# EAGLE board TRV_ANAREN_V0.4 (EAGLE 6.3)
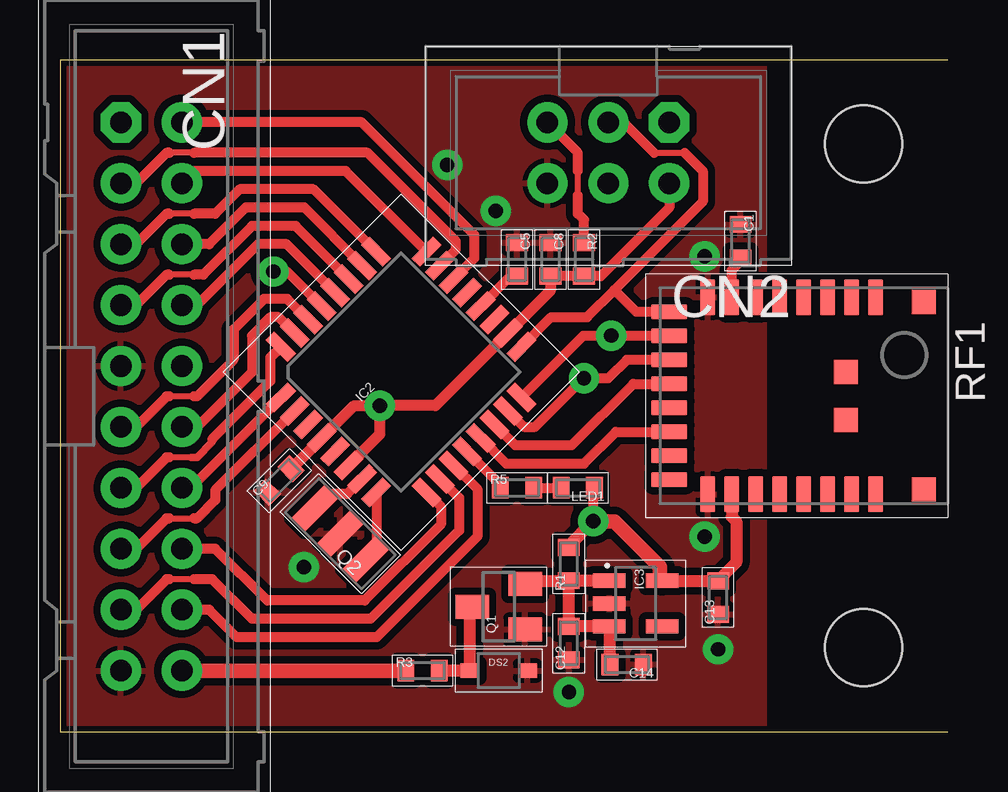
[diagram p0: board, top side]
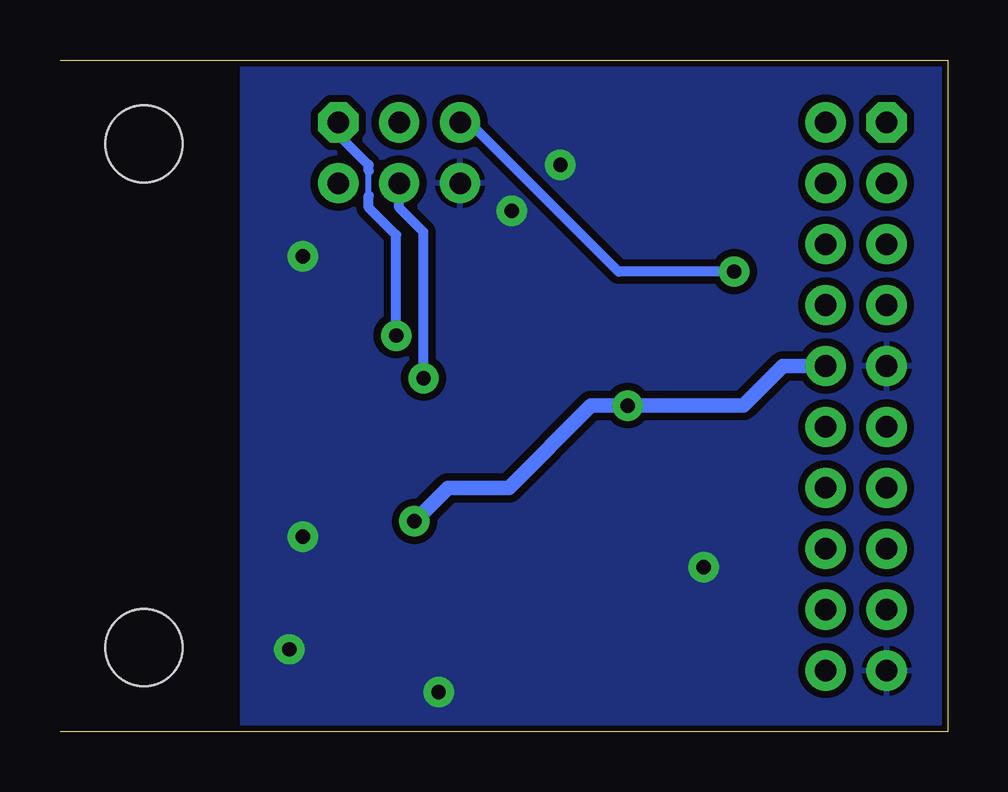
[diagram p1: board, bottom side, seen from below]

Size 37 x 28 mm. Coordinates in mm from the lower left corner, seen from the top.
Outline: 37,0 0,0 0,28 37,28
Copper layers (1*16): Top 0.035mm / dielectric 1.5mm / Bottom 0.035mm
Design rules "default *": minimum track width 8mil, minimum drill 0.3mm, track to track 12mil, track to pad 12mil, pad to pad 10mil, via to via 12mil, smd to smd 10mil, copper to edge 10mil, drill to drill 8mil, minimum pad ring 5mil, minimum via ring 8mil, stop-mask expansion 4mil, vias tented up to drill 25mil, thermal gap 8mil
Holes 3.2 mm at 33.5,24.5 33.5,3.5

## Footprints (pad centres in the part's own frame; a part is rotated, then mirrored left to right if it is on the bottom)
0603 = smd 0.7 x 0.9: 1 -0.697,0; 2 0.697,0
ML20 = drill 0.9 pad 1.676 octagon: 1 -11.43,-1.27 | drill 0.9 pad 1.676: 2 -11.43,1.27; 3 -8.89,-1.27; 4 -8.89,1.27; 5 -6.35,-1.27; 6 -6.35,1.27; 7 -3.81,-1.27; 8 -3.81,1.27; 9 -1.27,-1.27; 10 -1.27,1.27; 11 1.27,-1.27; 12 1.27,1.27; 13 3.81,-1.27; 14 3.81,1.27; 15 6.35,-1.27; 16 6.35,1.27; 17 8.89,-1.27; 18 8.89,1.27; 19 11.43,-1.27; 20 11.43,1.27
ML6 = drill 0.9 pad 1.676 octagon: 1 -2.54,-1.27 | drill 0.9 pad 1.676: 2 -2.54,1.27; 3 0,-1.27; 4 0,1.27; 5 2.54,-1.27; 6 2.54,1.27
SOD323 = smd 0.8 x 0.6: A 1.2,0; C -1.2,0
TQFP32-08 = smd 1.27 x 0.5: 1 -4.293,2.8; 2 -4.293,2; 3 -4.293,1.2; 4 -4.293,0.4; 5 -4.293,-0.4; 6 -4.293,-1.2; 7 -4.293,-2; 8 -4.293,-2.8; 17 4.293,-2.8; 18 4.293,-2; 19 4.293,-1.2; 20 4.293,-0.4; 21 4.293,0.4; 22 4.293,1.2; 23 4.293,2; 24 4.293,2.8 | smd 0.5 x 1.27: 9 -2.8,-4.293; 10 -2,-4.293; 11 -1.2,-4.293; 12 -0.4,-4.293; 13 0.4,-4.293; 14 1.2,-4.293; 15 2,-4.293; 16 2.8,-4.293; 25 2.8,4.293; 26 2,4.293; 27 1.2,4.293; 28 0.4,4.293; 29 -0.4,4.293; 30 -1.2,4.293; 31 -2,4.293; 32 -2.8,4.293
SOT23-5 = smd 0.6 x 1.35: 1 -0.95,-1.101; 2 0,-1.101; 3 0.95,-1.101; 4 0.95,1.101; 5 -0.951,1.101
SOT23 = smd 1 x 1.4: 1 -0.95,-1.1; 2 0.95,-1.1; 3 0,1.1
CR = smd 0.8 x 2: 1 -1.5,0; 2 1.5,0; M 0,0
ANAREN_C = smd 1.5 x 0.61: 1 -4.11,2.6; 2 -4.11,1.6; 3 -4.11,0.6; 4 -4.11,-0.4; 5 -4.11,-1.4; 6 -4.11,-2.4; 7 -4.11,-3.4; 8 -4.11,-4.4; 17 4.11,-4.4; 18 4.11,-3.4; 19 4.11,-2.4; 20 4.11,-1.4; 21 4.11,-0.4; 22 4.11,0.6; 23 4.11,1.6; 24 4.11,2.6 | smd 0.61 x 1.5: 9 -3.5,-6; 10 -2.5,-6; 11 -1.5,-6; 12 -0.5,-6; 13 0.5,-6; 14 1.5,-6; 15 2.5,-6; 16 3.5,-6 | smd 1 x 1: PL2 -3.91,4.6; PL3 3.91,4.6; PL4 -1,1.35; PL5 1,1.35

## Placement (x,y rotation side)
C1  n.b.  [0603]  28.37,20.45 270 top
C5  100n  [0603]  19.05,19.68 270 top
C8  100n  [0603]  20.45,19.68 270 top
C9  100n  [0603]  9.14,10.46 45 top
C12  1u  [0603]  21.21,3.68 90 top
C13  1u  [0603]  27.43,5.59 90 top
C14  100n  [0603]  23.63,2.79 180 top
CN1  EXT  [ML20]  3.81,13.97 270 top
CN2  ISP  [ML6]  22.86,24.13 180 top
DS2  PESD12VL1BA  [SOD323]  18.29,2.54 0 top
IC2  MEGA168PA-AU  [TQFP32-08]  14.22,14.99 45 top
IC3  LP2992-IM5-3.3  [SOT23-5]  24,5.33 270 top
LED1  LEDR  [0603]  21.59,10.16 180 top
Q1  IRLM9301  [SOT23]  18.29,5.21 90 top
Q2  [CR]  11.68,8.26 135 top
R1  n.b.  [0603]  21.21,6.99 90 top
R2  10k  [0603]  21.84,19.68 270 top
R3  0R  [0603]  15.11,2.54 0 top
R5  330R  [0603]  19.05,10.16 0 top
RF1  [ANAREN_C]  31.4,14 270 top

## Library data of the parts
C1 C5 C8 C9 C12-C14 R1-R3 R5 = RCL
CN1 CN2 = Conn
DS2 = Diode
IC2 = atmel
IC3 = DCDC
LED1 = Optic
Q1 = Transistor
Q2 = QUARTZ
RF1 = RF

## Nets
+3V3: C8.2 C9.2 C13.2 CN1.10 CN2.2 IC2.4 IC2.6 IC2.18 IC3.5 LED1.1 R1.2 R2.2 RF1.18
GND: C1.1 C5.1 C8.1 C9.1 C12.1 C13.1 C14.1 CN1.9 CN1.19 CN2.6 DS2.A IC2.3 IC2.5 IC2.21 IC3.2 Q1.1 Q2.M RF1.8 RF1.17
MISO: CN2.1 IC2.16 RF1.10
MOSI: CN2.4 IC2.15 RF1.11
N$1: C1.2 RF1.7
N$2: IC2.12 R5.1
N$3: CN1.2 IC2.22
N$5: DS2.C Q1.3 R3.2
N$6: C5.2 IC2.20
N$12: C12.2 C14.2 IC3.1 IC3.3 Q1.2 R1.1
N$18: IC2.7 Q2.2
N$19: IC2.8 Q2.1
N$21: LED1.2 R5.2
PC0: CN1.3 IC2.23
PC1: CN1.4 IC2.24
PC2: CN1.5 IC2.25
PC3: CN1.6 IC2.26
PC4: CN1.7 IC2.27
PC5: CN1.8 IC2.28
PD2: CN1.13 IC2.32
PD3: CN1.14 IC2.1
PD4: CN1.15 IC2.2
PD5: CN1.16 IC2.9
PD6: CN1.17 IC2.10
PD7: CN1.18 IC2.11
RIRQ: IC2.13 RF1.14
RSEL: IC2.14 RF1.12
RST: CN2.5 IC2.29 R2.1
RXD: CN1.11 IC2.30
SCK: CN2.3 IC2.17 RF1.9
TXD: CN1.12 IC2.31
VIN: CN1.20 R3.1

## Tracks (layer width: path | path; a pad name or v marks a point on that pad's centre or on a via)
+3V3  (via drill 0.6 pad 1.27)
  Top 0.406: IC2.4 | CN2.2 25.4,21.84 22.54,18.99 R2.2 C8.2 | LED1.1 22.23,10.1 v22.23,8.76
  Top 0.457: C9.2 IC2.4 | IC2.4 12.26,13.59 v13.34,13.59 | IC2.6 13.34,12.4 v13.34,13.59 | v13.34,13.59 15.65,13.59 IC2.18 20.45,18.38 C8.2
  Top 0.508: IC3.5 C13.2 28.19,7.05 28.19,8.76 28,8.96 RF1.18 | R1.2 21.21,7.75 v22.23,8.76
  Top 0.61: IC3.5 25.02,6.37 25.02,6.86 23.11,8.76 v22.23,8.76
  Bottom 0.61: CN1.10 6.86,15.24 8.51,13.59 v13.34,13.59 14.86,13.59 18.29,10.16 20.83,10.16 v22.23,8.76
GND  (via drill 0.6 pad 1.27)
  other vias: 10.17,6.86 26.87,8.13 26.87,19.81 27.44,3.43 18.17,21.71 16.14,23.62 21.22,1.65
  pour Top: 0,0 29.36,0 29.36,28 0,28
  pour Bottom: 0,0 29.36,0 29.36,28 0,28
MISO  (via drill 0.6 pad 1.27)
  Top 0.406: IC2.16 21.82,16.51 v22.99,16.51 v23,16.5 RF1.10
  Bottom 0.254: 24.13,22.35 24.13,23.37
  Bottom 0.406: v22.99,16.51 22.99,20.7 24.13,21.84 24.13,22.35 | 24.13,23.37 24.13,23.62 25.4,24.89 CN2.1
MOSI  (via drill 0.6 pad 1.27)
  Top 0.406: IC2.15 19.34,12.7 19.81,12.7 v21.84,14.73 22.86,14.73 23.63,15.5 RF1.11
  Bottom 0.406: v21.84,14.73 21.84,20.83 22.86,21.84 CN2.4
N$1
  Top 0.406: RF1.7 28,19.24 28.32,19.56 28.32,19.7 C1.2
N$2
  Top 0.406: IC2.12 18.35,10.29 R5.1
N$3
  Top 0.406: IC2.22 17.27,19.73 17.27,20.7 12.57,25.4 CN1.2
N$5
  Top 0.508: Q1.3 17.09,5.11 DS2.C R3.2
N$6
  Top 0.406: IC2.20 18.79,18.99 C5.2
N$12
  Top 0.406: IC3.1 23.31,6.28 | R1.1
  Top 0.508: C12.2 | C14.2 22.93,4.35 IC3.3 C12.2 | IC3.1 R1.1 | Q1.2 19.52,6.28 R1.1 | C12.2 R1.1
N$18
  Top 0.406: IC2.7 11.97,9.91 11.3,9.91 10.71,9.32 Q2.2
N$19
  Top 0.406: IC2.8 13.21,9.93 13.21,7.62 12.78,7.19 Q2.1
N$21
  Top 0.406: R5.2 LED1.2
PC0
  Top 0.254: 5.59,24.13 4.57,24.13
  Top 0.406: IC2.23 16.51,20.1 16.51,20.45 12.83,24.13 5.59,24.13 | 4.57,24.13 4.45,24.13 3.17,22.86 CN1.3
PC1
  Top 0.406: IC2.24 11.91,23.37 5.59,23.37 CN1.4
PC2
  Top 0.254: 5.59,21.59 4.57,21.59
  Top 0.406: 4.57,21.59 4.45,21.59 3.17,20.32 CN1.5 | IC2.25 10.56,22.61 7.49,22.61 6.48,21.59 5.59,21.59
PC3
  Top 0.406: IC2.26 10.19,21.84 7.75,21.84 6.22,20.32 CN1.6
PC4
  Top 0.254: 5.59,19.05 4.57,19.05
  Top 0.406: 4.57,19.05 4.45,19.05 3.17,17.78 CN1.7 | IC2.27 9.82,21.08 8,21.08 5.97,19.05 5.59,19.05
PC5
  Top 0.406: IC2.28 9.46,20.32 8.26,20.32 5.71,17.78 CN1.8
PD2
  Top 0.254: 5.46,11.43 4.57,11.43
  Top 0.305: 5.46,11.43 5.71,11.43 6.35,12.06 6.35,12.19
  Top 0.406: 4.57,11.43 4.45,11.43 3.17,10.16 CN1.13 | 6.35,12.19 8.76,14.61 8.76,15.6 IC2.32
PD3
  Top 0.406: IC2.1 5.44,10.16 CN1.14
PD4
  Top 0.254: 4.57,8.89 5.59,8.89
  Top 0.406: IC2.2 6.48,10.07 6.48,9.65 5.71,8.89 5.59,8.89 | CN1.15 3.17,7.62 4.45,8.89 4.57,8.89
PD5
  Top 0.406: CN1.16 6.48,7.62 8.64,5.46 12.7,5.46 15.88,8.64 15.88,9.38 IC2.9
PD6
  Top 0.254: 5.59,6.35 4.57,6.35
  Top 0.406: 5.59,6.35 6.35,6.35 8,4.7 12.95,4.7 16.64,8.38 16.64,9.74 IC2.10 | 4.57,6.35 4.45,6.35 3.17,5.08 CN1.17
PD7
  Top 0.406: CN1.18 6.22,5.08 7.37,3.94 13.21,3.94 17.4,8.13 17.4,10.11 IC2.11
RIRQ
  Top 0.406: IC2.13 18.6,11.18 21.84,11.18 23.17,12.5 RF1.14
RSEL
  Top 0.406: IC2.14 18.97,11.94 21.34,11.94 23.9,14.5 RF1.12
RST  (via drill 0.6 pad 1.27)
  Top 0.254: 21.59,22.35 21.59,23.37
  Top 0.406: IC2.29 9.47,19.18 v8.89,19.18 | 21.59,23.37 21.59,24.13 CN2.5 | R2.1 21.84,21.34 21.59,21.59 21.59,22.35
  Bottom 0.406: v8.89,19.18 13.72,19.18 19.94,25.4 CN2.5
RXD
  Top 0.254: 5.59,13.97 4.57,13.97
  Top 0.406: 4.57,13.97 4.45,13.97 3.17,12.7 CN1.11 | IC2.30 9.48,18.03 8.51,18.03 7.24,16.76 7.24,15.49 5.71,13.97 5.59,13.97
SCK
  Top 0.254: 24.77,24.13 26.04,24.13
  Top 0.406: CN2.3 23.5,25.4 24.77,24.13 | 26.04,24.13 26.8,23.37 26.8,22.1 23.11,18.41 | 23.11,18.41 21.97,17.27 20.47,17.27 IC2.17 | RF1.9 24.03,17.5 23.11,18.41
TXD
  Top 0.406: IC2.31 9.11,17.27 8.76,17.27 8,16.51 8,14.99 5.71,12.7 CN1.12
VIN
  Top 0.61: CN1.20 R3.1